# Altium PCB Control_Board_Model_C201_FFC_Sens_Conn.PcbDoc (part 11 of 12)
Units mil, origin at the board's own origin, x right, y up, seen from the top; angles counter-clockwise.
Board outline 3937.01 x 2755.91 mil, 6 copper layers (1-SIG-TOP, 2-GND, 3-PWR, 4-SIG-HOR, 5-SIG-VERT, 6-GND-BOT), stack 46.063 mil thick; 497 components, 379 nets, 1804 pads, 1610 vias.
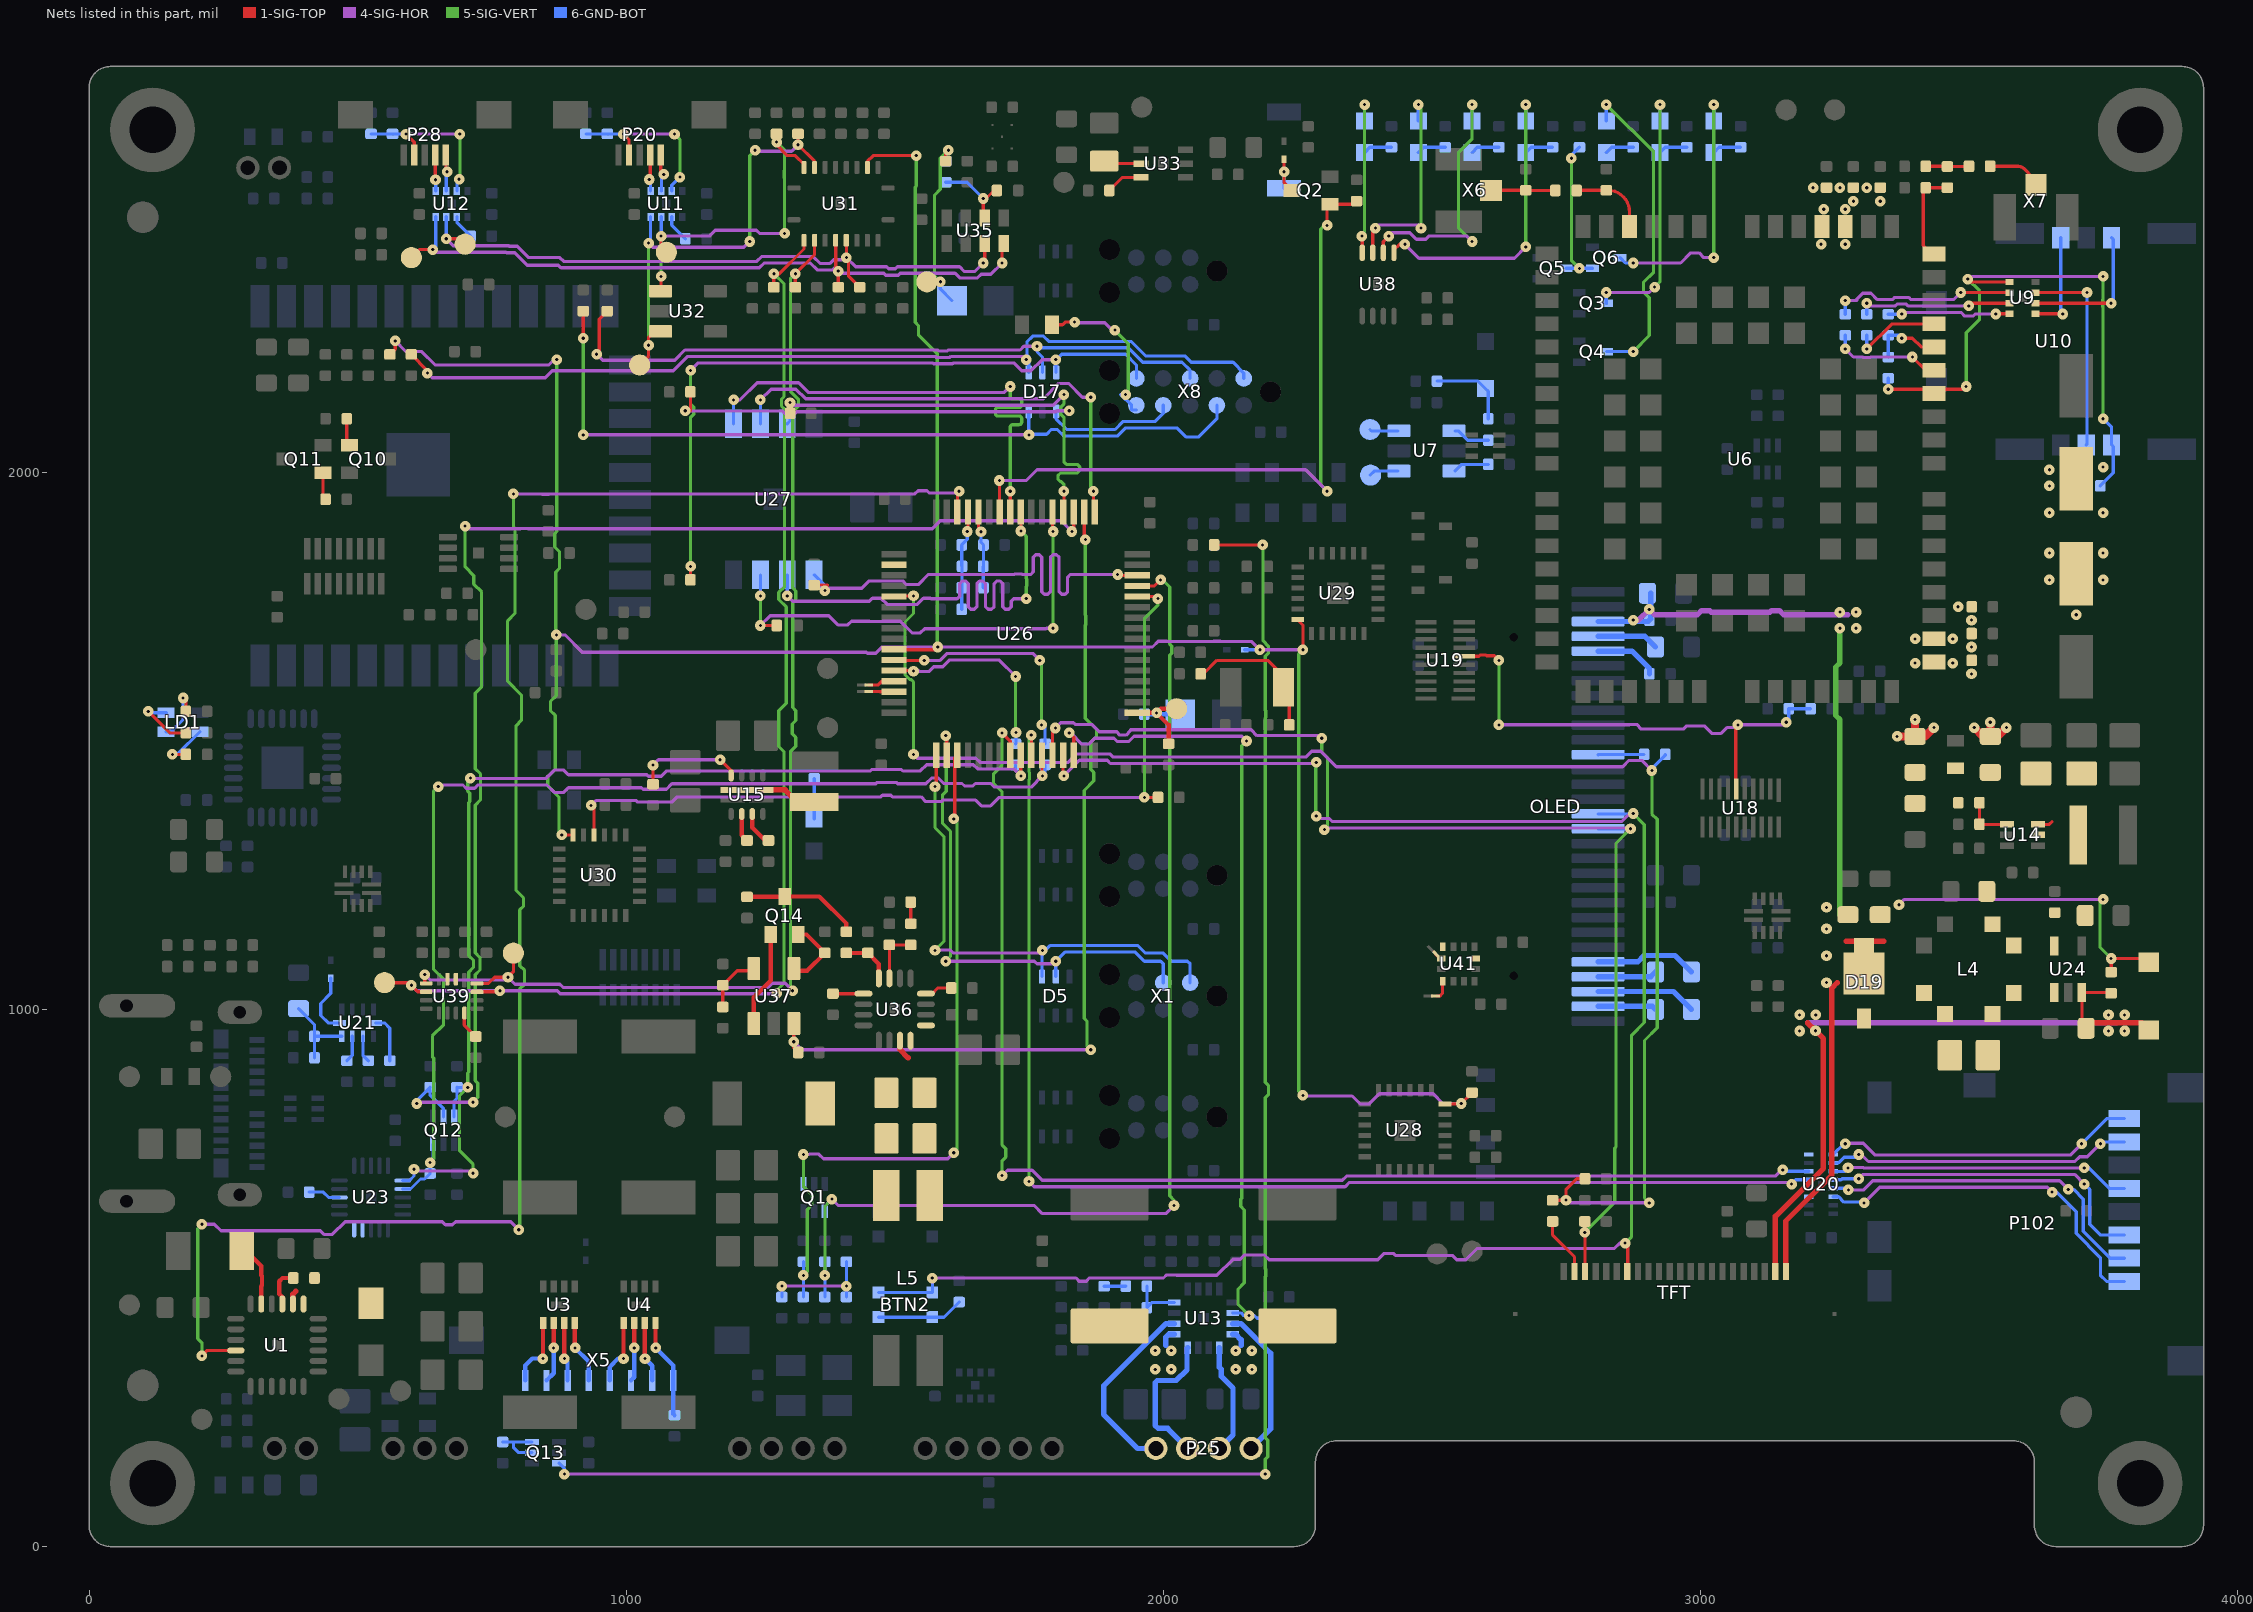
[diagram p10: the nets of this part, all layers, seen from the top]

## Via types
v1: diameter 19.68, hole 5.91, 1-SIG-TOP to 6-GND-BOT, tented both sides, 1553 vias
v2: diameter 23.81, hole 11.81, 1-SIG-TOP to 6-GND-BOT, tented both sides, 27 vias
v3: diameter 23.82, hole 11.81, 1-SIG-TOP to 6-GND-BOT, tented both sides, 26 vias
v4: diameter 21.65, hole 7.87, 1-SIG-TOP to 6-GND-BOT, tented both sides, 4 vias

## Nets (pads, with @x,y where several pads share a name; then routed paths per layer and width w, separated by ;. In a path a pad name is that pad's centre, name@x,y a point inside that pad or via, vN(x,y) a via of type N, cw(c..) or ccw(c..) an arc to the next point about the centre after c; other vN are vias at no path point) (continued)
I2C1.SCL: R146.1 TP5.1 U11.7 U31.9 U32.1 | length 680.1
  1-SIG-TOP w6: U32.1@1063.82,2337.41 1065,2337.41 v1(1065,2365) ; v1(1065,2440) 1065,2420 TP5.1@1075,2410 ; R146.1@1280,2630.32 v1(1280,2615) 1280,2610 1300,2590 1315,2590 1331.1,2573.9 U31.9@1331.1,2567.91
  4-SIG-HOR w6: v1(1065,2440) 1155,2440 1165.84,2450.84 1242.45,2450.84 1248.3,2445 v1(1295,2445)
  5-SIG-VERT w6: v1(1065,2365) v1(1065,2440) ; v1(1280,2615) 1295,2600 1295,2562.34 1294.2,2561.54 1294.2,2548.46 1295,2547.66 v1(1295,2445)
  6-GND-BOT w6: v1(1065,2440) 1065.16,2440.16 U11.7@1065.16,2475.98
I2C1.SDA: R145.1 TP6.1 U11.8 U31.8 U32.3 | length 857.1
  1-SIG-TOP w6: TP6.1@1025,2200 1041.72,2216.72 v1(1041.72,2236.72) 1041.72,2251.72 1052.6,2262.6 U32.3@1063.82,2262.6 ; R145.1@1320,2630.32 v1(1320,2610) 1350.79,2579.21 U31.8@1350.79,2567.91
  4-SIG-HOR w6: v1(1041.72,2426.96) 1049.52,2419.16 1219.16,2419.16 v1(1230,2430) ; v1(1240,2600) 1241.95,2598.05 1308.05,2598.05 v1(1320,2610)
  5-SIG-VERT w6: v1(1041.72,2236.72) v1(1041.72,2426.96) ; v1(1230,2430) 1230,2590 v1(1240,2600)
  6-GND-BOT w6: v1(1041.72,2426.96) 1045.47,2430.72 U11.8@1045.47,2475.98
I2C2.SCL: R148.1 TP7.1 U31.13 U39.5 U39.16 | length 2307.2
  1-SIG-TOP w6: v1(625,1065) 625,1051.38 U39.5@627.76,1048.62 ; U39.16@722.24,1048.62 743.62,1048.62 755,1060 v1(780,1060) 790,1070 TP7.1@790,1105 ; R148.1@1315,2344.68 v1(1315,2370) 1350.79,2405.79 U31.13@1350.79,2432.09
  4-SIG-HOR w6: v1(625,1065) 635,1055 775,1055 v1(780,1060) 793,1047 876.6,1047 882.42,1041.17 1264.55,1041.17 1272.2,1048.83 1296.17,1048.83 v1(1310,1035)
  5-SIG-VERT w6: v1(1310,1035) 1305.84,1039.16 1305.84,1480 1315.8,1489.95 1315.8,1506.54 1309.2,1513.13 1309.2,1531.54 1315.8,1538.13 1315.8,1556.54 1310,1562.34 1310,1757.66 1315.8,1763.46 1315.8,1779.2 1310,1785 1310,2112.66 1320.8,2123.46 1320.8,2136.54 1305.84,2151.5 1305.84,2360.84 v1(1315,2370)
I2C2.SDA: R147.1 TP8.1 U31.12 U39.6 U39.15 | length 2309.6
  1-SIG-TOP w6: TP8.1@550,1050 595,1050 v1(600,1045) 612.13,1032.87 U39.6@627.76,1032.87 ; U39.15@722.24,1032.87 762.87,1032.87 v1(765,1035) ; R147.1@1275,2344.68 v1(1275,2370) 1285,2370 1331.1,2416.1 U31.12@1331.1,2432.09
  4-SIG-HOR w6: v1(600,1045) 610,1035 v1(765,1035) 871.63,1035 877.45,1029.17 1279.17,1029.17 v1(1280,1030)
  5-SIG-VERT w6: v1(1275,2370) 1293.84,2351.16 1293.84,2141.18 1289.2,2136.54 1289.2,2123.46 1295,2117.66 1295,1787.34 1284.2,1776.54 1284.2,1763.46 1298,1749.66 1298,1570.34 1284.2,1556.54 1284.2,1489.64 1293.84,1480 1293.84,1048.84 1280,1035 v1(1280,1030)
I2C3.SCL: R150.1 TP9.1 U12.7 U31.16 U35.3 | length 1266.7
  1-SIG-TOP w6: v1(665,2435) 690,2435 TP9.1@700,2425 ; U31.16@1409.84,2432.09 1410,2431.93 v1(1410,2400) 1413.84,2396.16 1413.84,2365.84 R150.1@1435,2344.68 ; v1(1665,2390) 1667.72,2392.72 U35.3@1667.72,2426.38
  4-SIG-HOR w6: v1(665,2435) 678,2422 781.37,2422 782.2,2421.17 797.34,2421.17 818.51,2400 876.45,2400 883.45,2393 1243,2393 1252,2402 1348,2402 1360.84,2389.16 1379.68,2389.16 1386.37,2395.84 1405.84,2395.84 v1(1410,2400) 1427.2,2382.8 1484.87,2382.8 1488.46,2379.2 1501.54,2379.2 1505.13,2382.8 1620.77,2382.8 1629.36,2374.2 1649.2,2374.2 v1(1665,2390)
  6-GND-BOT w6: v1(665,2435) 665.16,2435.16 U12.7@665.16,2475.98
I2C3.SDA: R149.1 TP10.1 U12.8 U31.15 U35.4 | length 1342.7
  1-SIG-TOP w6: TP10.1@600,2400 615,2415 v1(640,2415) ; U31.15@1390.16,2432.09 1390.16,2379.84 v1(1395,2375) R149.1@1395,2344.68 ; v1(1700,2390) 1700,2415.35 1703.15,2418.5 U35.4@1703.15,2426.38
  4-SIG-HOR w6: v1(640,2415) 645,2410 776.4,2410 777.23,2409.17 792.37,2409.17 815.7,2385.84 873.63,2385.84 878.48,2381 1247.97,2381 1256.97,2390 1343.03,2390 1355.87,2377.16 1384.65,2377.16 1387.49,2380 1390,2380 v1(1395,2375) 1399.2,2370.8 1479.9,2370.8 1483.49,2367.2 1506.51,2367.2 1510.1,2370.8 1612.5,2370.8 1621.09,2362.2 1654.18,2362.2 1660.92,2368.95 1678.95,2368.95 v1(1700,2390)
  6-GND-BOT w6: v1(640,2415) 645.47,2420.47 U12.8@645.47,2475.98
KEY_1: U3.1 X5.1 | length 132
  1-SIG-TOP w8: v1(845,350) 845.16,350.16 845.16,415.63 U3.1@845.47,415.94
  6-GND-BOT w8: X5.1@812.2,309.45 812.2,337.2 825,350 v1(845,350)
KEY_2: U3.2 X5.2 | length 112.1
  1-SIG-TOP w8: v1(865,370) 865.16,370.16 U3.2@865.16,415.94
  6-GND-BOT w8: X5.2@851.57,309.45 865,322.87 v1(865,370)
KEY_3: U3.3 X5.3 | length 109
  1-SIG-TOP w8: U3.3@884.84,415.94 884.84,350.16 v1(885,350)
  6-GND-BOT w8: v1(885,350) 890.94,344.06 X5.3@890.94,309.45
KEY_4: U3.4 X5.4 | length 117.2
  1-SIG-TOP w8: U3.4@904.53,415.94 904.53,370.47 v1(905,370)
  6-GND-BOT w8: v1(905,370) 930.31,344.68 X5.4@930.31,309.45
KEY_5: U4.1 X5.5 | length 123
  1-SIG-TOP w8: v1(995,350) 995.16,350.16 995.16,415.63 U4.1@995.47,415.94
  6-GND-BOT w8: X5.5@969.69,309.45 969.69,334.69 985,350 v1(995,350)
KEY_6: U4.2 X5.6 | length 109
  1-SIG-TOP w8: v1(1015,370) 1015.16,370.16 U4.2@1015.16,415.94
  6-GND-BOT w8: X5.6@1009.06,309.45 1015,315.39 v1(1015,370)
KEY_7: U4.3 X5.7 | length 112.1
  1-SIG-TOP w8: U4.3@1034.84,415.94 1034.84,350.16 v1(1035,350)
  6-GND-BOT w8: v1(1035,350) 1048.43,336.57 X5.7@1048.43,309.45
KEY_8: R36.2 U4.4 X5.8 | length 186
  1-SIG-TOP w8: U4.4@1054.53,415.94 1054.53,370.47 v1(1055,370)
  6-GND-BOT w8: v1(1055,370) 1087.8,337.2 X5.8@1087.8,309.45 1087.8,246.89 R36.2@1090,244.68
LCD_BL_A: C85.1 C87.1 C93.2 C94.1 D19.1 D20.1 OLED.28 R113.1 TFT.1 | length 2361.5
  1-SIG-TOP w6: R113.1@3765,1069.68 v1(3765,1095) 3827.99,1095 D20.1@3835.01,1087.99
  1-SIG-TOP w10: TFT.1@3159.45,511.81 3159.16,512.1 3159.16,606.15 3245,692 3245,1040 3255,1050 ; 3271.9,1126.9 3341.9,1126.9
  4-SIG-HOR w6: v1(3370,1195) 3380,1205 v1(3750,1205)
  4-SIG-HOR w10: v1(2875,1725) 2885,1725 v1(2905,1745) 2915,1735 2994.83,1735 3002.63,1742.8 3017.37,1742.8 3020.17,1740 3129.83,1740 3132.63,1742.8 3147.37,1742.8 3155.17,1735 3275,1735
  5-SIG-VERT w6: v1(3750,1205) 3744.2,1199.2 3744.2,1115.8 v1(3765,1095)
  5-SIG-VERT w10: 3260,1175 3260,1539.83 3252.2,1547.63 3252.2,1637.37 3260,1645.17 v1(3260,1710)
  6-GND-BOT w10: OLED.28@2809.84,1722.44 2902.76,1722.44 C87.1@2905.32,1725 2907.44,1727.13 C85.1@2907.44,1775
  other v1: 3235,1050 3235,1100 3235,1150 3235,1190 3290,1710 3260,1740 3290,1740
LCD_BL_K: D20.2 R112.2 R113.2 TFT.2 U24.3 | length 1337.1
  1-SIG-TOP w6: R112.2@3718.46,965 3710.59,972.87 U24.3@3710.59,1031.69 3763.62,1031.69 R113.2@3764.22,1031.1
  1-SIG-TOP w10: TFT.2@3139.76,511.81 3139.76,614.76 3229,704 3229,946 v1(3214.5,960.5) 3200,975 ; R112.2@3718.46,965 3728.46,975 3822.01,975 D20.2@3835.01,962
  4-SIG-HOR w10: 3200,975 3775,975
  other v1: 3185,960 3760,960 3790,960 3185,990 3215,990 3760,990 3790,990
MICRO_SD.DAT1: U20.8
MICRO_SD.DAT2: U20.3
NetB1_1: B1.1 C101.1 R130.2 TP27.1 U26.1 | length 212.7
  1-SIG-TOP w8: U26.1@1951.38,1552.36 v1(1987.64,1552.36) ; C101.1@2010,1494.68 2010,1530 v1(1987.64,1552.36) ; TP27.1@2025,1560 1995.28,1560 v1(1987.64,1552.36)
  6-GND-BOT w8: R130.2@1964.69,1550 1985.28,1550 v1(1987.64,1552.36) 1990,1550 B1.1@2031.69,1550
NetBTN2_1: BTN2.1 R4.2 | length 161.9
  6-GND-BOT w6: BTN2.1@1469.8,427.17 BTN2.1@1570.2,427.17 1591.85,427.17 R4.2@1620,455.32
NetC2_1: C2.1 U1.21 | length 73.9
  1-SIG-TOP w8: U1.21@359.84,451.18 U1.21@359.84,451.77 359.84,464.65 354.16,470.34 354.16,494.16 360,500 C2.1@380.31,500
NetC2_2: C2.2 L1.1 U1.19 U1.20 | length 25.5
  1-SIG-TOP w10: U1.20@379.53,451.77 379.53,469.86 384.8,475.13
NetC4_2: C4.2 U1.23 | length 111.4
  1-SIG-TOP w8: C4.2@292.87,550 320.47,522.4 320.47,505.42 321.84,504.05 321.84,485.95 320.47,484.58 U1.23@320.47,451.77 U1.23@320.47,451.18
NetC11_2: C11.2 R20.1 X3.2 | length 272.1
  1-SIG-TOP w6: R20.1@2069.69,1625 2075,1625 2100,1650 2195,1650 2224.21,1620.79 X3.2@2224.21,1600 2234.69,1589.53 C11.2@2234.69,1530
NetC22_1: C22.1 R47.2 U6.43 U9.5 U10.S1 | length 1136.4
  1-SIG-TOP w6: v1(3350,2155) 3427.28,2155 U6.43@3435.24,2147.05 3443.19,2155 3490,2155 v1(3495,2160) ; v1(3497.94,2360) 3503.41,2354.53 U9.5@3575.98,2354.53
  4-SIG-HOR w6: v1(3497.94,2360) 3502.94,2365 v1(3750,2365)
  5-SIG-VERT w6: v1(3495,2160) 3495,2260 3520,2285 3520,2337.94 v1(3497.94,2360) ; v1(3750,2100) 3750,2307.66 3749.2,2308.46 3749.2,2321.54 3750,2322.34 v1(3750,2365)
  6-GND-BOT w6: v1(3350,2155) R47.2@3350,2175.32 ; C22.1@3744.68,1975 3768.84,1999.16 3768.84,2048.09 U10.S1@3765.75,2051.18 3765.75,2084.25 v1(3750,2100)
NetC25_1: C25.1 C27.1 C29.1 C31.1 FB2.1 U6.52 U6.53 | length 106.8
  1-SIG-TOP w15: v1(3366.54,1508.46) FB2.1@3400,1508.46 ; v1(3400,1540) FB2.1@3400,1508.46 ; v1(3435,1525) 3418.46,1508.46 FB2.1@3400,1508.46
  other v1: 3650,1925 3750,1925 3650,1975 3650,2005 3750,2010 3225,2425 3270,2425 3230,2490 3270,2490 3285,2505 3335,2505 3210,2530 3260,2530 3310,2530
NetC26_1: C26.1 C28.2 C30.2 C32.2 FB3.1 U6.32 U6.33 | length 100.2
  1-SIG-TOP w15: v1(3510,1525) 3526.54,1508.46 FB3.1@3540,1508.46 ; v1(3540,1535) FB3.1@3540,1508.46 ; v1(3570,1525) 3553.46,1508.46 FB3.1@3540,1508.46
  other v1: 3505,1625 3400,1645 3470,1645 3505,1675 3400,1690 3470,1690 3505,1725 3700,1735 3480,1750 3650,1800 3750,1800 3650,1850 3750,1850
NetC33_2: C33.2 R51.1 U6.60 | length 148.7
  1-SIG-TOP w6: R51.1@2769.68,2525 2770,2525.32 C33.2@2825,2525.32 2828.28,2525.32 cw(c2828.28,2485.71) 2856.29,2513.71 cw(c2827.27,2484.69) 2868.31,2484.69 U6.60@2868.31,2458.07
NetC34_2: C34.2 R52.1 U6.49 | length 173.4
  1-SIG-TOP w6: U6.49@3433.31,2407.69 cw(c3433.31,2417.34) 3426.49,2410.51 3416,2421 cw(c3418.41,2423.41) 3415,2423.41 3415,2518.69 cw(c3431,2518.69) C34.2@3419.68,2530 3459.68,2530 R52.1@3460,2530.32
NetC35_2: C35.2 R51.2 X6.2 | length 120.5
  1-SIG-TOP w6: X6.2@2610.04,2525 2610.35,2525.32 C35.2@2675,2525.32 2675.32,2525 R51.2@2730.32,2525
NetC36_2: C36.2 C37.1 R52.2 | length 80.9
  1-SIG-TOP w6: C36.2@3419.68,2570 3459.68,2570 R52.2@3460,2569.68 3500,2569.68 C37.1@3500.32,2570
NetC37_2: C37.2 X7.2 | length 103.1
  1-SIG-TOP w6: C37.2@3539.68,2570 3592.34,2570 cw(c3592.34,2556.34) 3602,2566 X7.2@3619.37,2548.63 ; X7.2@3619.38,2548.62 cw(c3605.78,2535.04) X7.2@3625,2535.04
NetC53_2: C53.2 R83.1 | length 40.4
  6-GND-BOT w6: C53.2@1890,484.68 1930,484.68 R83.1@1930.31,485
NetC59_2: C59.2 C60.2 D16.1 FB1.1 FB2.2 FB3.2 R99.2 U14.6 | length 28.3
  1-SIG-TOP w6: U14.6@3628.94,1344.68 3649.68,1344.68 3655,1350
NetC63_2: C63.2 U15.9 | length 53.5
  1-SIG-TOP w8: U15.9@1215.16,1364.07 1215.16,1324.53 C63.2@1225,1314.68
NetC73_1: C73.1 C74.1 R125.2 U21.9 | length 154.6
  6-GND-BOT w6: C73.1@390,1001.54 419.69,971.85 C74.1@419.69,950 ; R125.2@419.69,910 C74.1@419.69,950 ; U21.9@470.47,950 C74.1@419.69,950
NetC83_1: C83.1 OLED.4 | length 110.4
  6-GND-BOT w10: OLED.4@2809.84,1061.02 2907.56,1061.02 C83.1@2916.54,1070
NetC83_2: C83.2 OLED.5 | length 191.2
  6-GND-BOT w10: OLED.5@2809.84,1088.58 2883.58,1088.58 2895.5,1100.5 2952.96,1100.5 C83.2@2983.46,1070
NetC84_2: C84.2 OLED.27 | length 114.9
  6-GND-BOT w10: OLED.27@2809.84,1694.88 2896.65,1694.88 C84.2@2916.54,1675
NetC86_1: C86.1 OLED.2 | length 109.1
  6-GND-BOT w10: OLED.2@2809.84,1005.91 2910.63,1005.91 C86.1@2916.54,1000
NetC86_2: C86.2 OLED.3 | length 187.5
  6-GND-BOT w10: OLED.3@2809.84,1033.46 2950,1033.46 C86.2@2983.46,1000
NetC89_2: C89.2 U23.3 | length 60.4
  6-GND-BOT w6: C89.2@409.69,660 435.9,660 445.9,650 U23.3@465.94,650
NetC90_2: C90.2 C91.1 FB4.2 L4.4 U24.5
NetC92_1: C92.1 L4.3 U24.1
NetC92_2: C92.2 D19.2 L4.2
NetC104_2: C104.2 C105.2 R131.1 U26.28 | length 145.9
  1-SIG-TOP w6: U26.28@1656.1,1926.38 1656.1,1893.9 1656.34,1893.9 v1(1660.68,1889.55)
  6-GND-BOT w6: v1(1660.68,1889.55) 1660.68,1869.63 C104.2@1665.31,1865 1665.31,1825.63 R131.1@1664.69,1825 1664.69,1785.63 C105.2@1665.31,1785
NetC106_2: C106.2 C107.2 FB5.1 R131.2 U26.29 | length 186.8
  1-SIG-TOP w6: v1(1635,1890) 1636.42,1891.42 U26.29@1636.42,1926.38
  6-GND-BOT w6: FB5.1@1624.69,1745 C107.2@1624.69,1785 1625.31,1785.63 R131.2@1625.31,1825 1624.69,1825.63 C106.2@1624.69,1865 1635,1875.32 v1(1635,1890)
NetC122_1: C122.1 U33.3 | length 69.1
  1-SIG-TOP w6: C122.1@1899.69,2525 1924.1,2549.42 U33.3@1958.66,2549.42
NetC125_2: C125.2 R160.1 U35.6 | length 151.6
  1-SIG-TOP w6: U35.6@1667.72,2473.62 1667.72,2481.5 1665,2484.21 v1(1665,2510) 1670,2510 1685,2525 C125.2@1690.31,2525
  6-GND-BOT w6: R160.1@1595,2540.32 1634.69,2540.32 v1(1665,2510)
NetC127_1: C127.1 R160.2 R161.1 TP28.1 | length 373.9
  1-SIG-TOP w6: TP28.1@1560,2355 v1(1585,2355) ; R161.1@1595,2579.68 1595,2594.68 1600,2599.68 v1(1600,2600)
  5-SIG-VERT w6: v1(1585,2355) 1574.2,2365.8 1574.2,2516.54 1584.84,2527.18 1584.84,2584.84 v1(1600,2600)
  6-GND-BOT w6: v1(1585,2355) 1585,2341.69 C127.1@1606.69,2320 ; R160.2@1595,2579.68 1595,2595 v1(1600,2600)
NetC128_2: C128.2 U36.4 | length 51.6
  1-SIG-TOP w6: U36.4@1558.07,1029.53 1569.53,1029.53 1580,1040 C128.2@1605.31,1040
NetC129_2: C129.2 R163.1 | length 40.4
  1-SIG-TOP w6: C129.2@1529.69,1200 1530,1199.68 R163.1@1530,1159.68
NetC132_2: C132.2 R163.2 U36.7 | length 102.3
  1-SIG-TOP w6: U36.7@1490.16,1058.07 1490.16,1120.16 C132.2@1490,1120.32 R163.2@1530,1120.32
NetC133_2: C133.2 FB6.2 U37.5 | length 111.3
  1-SIG-TOP w6: FB6.2@1180,1002.72 FB6.2@1180,1004.68 C133.2@1180,1045.32 1206.93,1072.24 U37.5@1237.59,1072.24
NetC134_1: C134.1 C135.1 L5.1 U36.1 U36.15 U36.16 | length 38.2
  1-SIG-TOP w10: U36.15@1509.84,941.93 1509.84,925.16 1525,910
NetC134_2: C134.2 C135.2 D23.2 L5.2
NetD8_2: D8.2 P24.2 Q2.3 | length 95.4
  1-SIG-TOP w6: D8.2@2225,2583.46 v1(2225,2560) 2225,2539.56 Q2.3@2239.57,2524.99
  6-GND-BOT w6: P24.2@2225,2529.13 v1(2225,2560)
NetD11_1: D11.1 U38.4 | length 311.6
  1-SIG-TOP w6: v1(2370,2440) 2370.47,2439.53 U38.4@2370.47,2409.06 U38.4@2370.47,2406.1
  5-SIG-VERT w6: v1(2370,2440) 2375,2445 v1(2375,2685)
  6-GND-BOT w6: D11.1@2375,2654.53 v1(2375,2685)
NetD11_2: D11.2 R35.1 | length 54.1
  6-GND-BOT w6: D11.2@2375,2595.47 2384.84,2605.32 R35.1@2425,2605.32
NetD12_1: D12.1 R39.2 R42.2 | length 154.4
  6-GND-BOT w6: R42.2@2509.68,2170 2586.12,2170 D12.1@2600.01,2156.11 2605.32,2150.8 R39.2@2605.32,2100
NetD13_1: D13.1 Q3.3 | length 490.2
  4-SIG-HOR w6: v1(2825,2335) 2905,2335 v1(2915,2345)
  5-SIG-VERT w6: v1(2915,2345) 2925,2355 v1(2925,2685)
  6-GND-BOT w6: v1(2825,2335) 2825,2314.41 Q3.3@2825.59,2315 ; D13.1@2925,2654.53 v1(2925,2685)
NetD13_2: D13.2 R43.1 | length 54.1
  6-GND-BOT w6: D13.2@2925,2595.47 2934.84,2605.32 R43.1@2975,2605.32
NetD14_1: D14.1 Q4.3 | length 601.1
  5-SIG-VERT w6: v1(2825,2685) 2913,2597 2913,2372.48 2894.16,2353.63 2894.16,2336.37 2905,2325.52 2905,2255 v1(2875,2225)
  6-GND-BOT w6: D14.1@2825,2654.53 v1(2825,2685) ; Q4.3@2825.59,2225 v1(2875,2225)
NetD14_2: D14.2 R44.1 | length 54.1
  6-GND-BOT w6: D14.2@2825,2595.47 2834.84,2605.32 R44.1@2875,2605.32
NetD15_1: D15.1 Q6.3 | length 505.5
  4-SIG-HOR w6: v1(2875,2390) 2963.37,2390 2982.2,2408.83 2997.8,2408.83 3006.63,2400 v1(3025,2400)
  5-SIG-VERT w6: v1(3025,2400) v1(3025,2685)
  6-GND-BOT w6: Q6.3@2850.59,2400 2860.59,2390 v1(2875,2390) ; D15.1@3025,2654.53 v1(3025,2685)
NetD15_2: D15.2 R46.1 | length 54.1
  6-GND-BOT w6: D15.2@3025,2595.47 3034.84,2605.32 R46.1@3075,2605.32
NetD17_1: D17.1 R92.1 X8.4 | length 1038.5
  1-SIG-TOP w6: v1(1110,2115) 1119.37,2115 1119.69,2115.32 R92.1@1119.69,2150
  4-SIG-HOR w6: v1(1110,2115) 1110.84,2114.16 1291.37,2114.16 1296.37,2109.16 1313.63,2109.16 1317.48,2113 1799.97,2113 1801.97,2115 v1(1825,2115)
  6-GND-BOT w6: v1(1825,2115) 1801.81,2115 D17.1@1800.59,2113.78 1800.59,2099.41 1820,2080 1910.31,2080 1925.31,2095 1985,2095 2000,2110 X8.4@2000,2125
NetD17_3: D17.3 R91.1 X8.2 | length 1518
  1-SIG-TOP w6: v1(920,2250) R91.1@920,2300.32
  4-SIG-HOR w6: v1(920,2070) v1(1750,2070)
  5-SIG-VERT w6: v1(920,2070) v1(920,2250)
  6-GND-BOT w6: D17.3@1749.41,2113.78 v1@1749.41,2071.16 ; X8.2@2100,2125 2100,2100 2066.16,2066.16 2042.2,2066.16 2025.35,2083 1930.28,2083 1915.28,2068 1815.03,2068 1803.03,2080 1791.65,2080 1782.8,2071.16 v1@1749.41,2071.16 ; v1@1749.41,2070.59 v1(1750,2070) v1@1749.41,2070.59 ; v1@1749.41,2070.59 1748.84,2071.16 v1@1749.41,2071.16 ; v1@1749.41,2070.59 v1@1749.41,2071.16
NetD17_4: D17.4 R95.1 X8.10 | length 1699
  1-SIG-TOP w6: R95.1@600,2219.68 630,2189.68 v1(630,2185)
  4-SIG-HOR w6: v1(630,2185) 638.84,2176.16 849.21,2176.16 862.21,2189.16 1087.51,2189.16 1114.35,2216 1575.4,2216 1577.23,2214.17 1602.77,2214.17 1604.6,2216 1739,2216 v1(1745,2210)
  6-GND-BOT w6: v1(1745,2210) v1@1749.41,2214.41 ; D17.4@1749.41,2186.22 v1@1749.41,2214.41 ; X8.10@2150,2175 2150,2185 2130,2205 2051.97,2205 2039.97,2217 1966.94,2217 1939.94,2244 1786.97,2244 1777.13,2253.84 1757.2,2253.84 1746.16,2242.8 1746.16,2218.84 v1@1749.41,2215.59 ; v1@1749.41,2214.41 v1@1749.41,2215.59 ; v1@1749.41,2214.41 1750,2215 v1@1749.41,2215.59
NetD17_5: D17.5 R94.1 X8.8 | length 1297.1
  1-SIG-TOP w6: v1(945,2220) 950,2225 950,2285.32 R94.1@965,2300.32
  4-SIG-HOR w6: v1(945,2220) 956.08,2208.92 1090.3,2208.92 1109.38,2228 1580.37,2228 1582.2,2226.17 1597.8,2226.17 1599.63,2228 1733.52,2228 1740.52,2235 v1(1765,2235)
  6-GND-BOT w6: D17.5@1775,2186.22 1775,2215 1765,2225 v1(1765,2235) 1768,2232 1934.97,2232 1961.97,2205 2035,2205 2050,2190 X8.8@2050,2175
NetD17_6: D17.6 R93.1 X8.6 | length 1311.9
  1-SIG-TOP w6: R93.1@1119.69,1800 1119.69,1824.68 v1(1120,1825)
  4-SIG-HOR w6: v1(1120,2190) 1134,2204 1570.43,2204 1572.26,2202.17 1607.74,2202.17 1609.57,2204 1721.52,2204 1736.37,2189.16 1753.63,2189.16 1774.48,2210 v1(1800,2210)
  5-SIG-VERT w6: v1(1120,1825) 1120,2102.66 1125.8,2108.46 1125.8,2121.54 1120,2127.34 v1(1120,2190)
  6-GND-BOT w6: v1(1800,2210) 1800,2206.22 v1@1800.59,2205.63 ; D17.6@1800.59,2186.22 v1@1800.59,2205.63 ; X8.6@1950,2175 1950,2200 1930,2220 1811.18,2220 1800.59,2209.41 v1@1800.59,2205.63
NetD18_2: D18.2 R101.1 | length 75.8
  6-GND-BOT w6: D18.2@1350,1354.53 R101.1@1350,1430.32
NetD22_1: D22.1 U21.10 | length 118.1
  6-GND-BOT w6: D22.1@450,1058.46 450,1030 431.16,1011.16 431.16,988.84 445,975 U21.10@466.14,975
NetJ1_2: J1.2 X8.5 | length 313.4
  1-SIG-TOP w6: J1.2@1792.56,2275 1812.56,2275 1817.56,2280 v1(1835,2280)
  4-SIG-HOR w6: v1(1835,2280) 1836.34,2278.66 1891.34,2278.66 1905,2265 v1(1910,2265)
  5-SIG-VERT w6: v1(1910,2265) 1935,2240 1935,2150 v1(1930,2145)
  6-GND-BOT w6: v1(1930,2145) 1921,2145 1941,2125 1941,2116 X8.5@1950,2116
NetL2_2: L2.2 U14.5
NetL3_1: L3.1 U15.2 | length 134.2
  1-SIG-TOP w10: U15.2@1225,1408.86 1296.14,1408.86 1318.39,1386.61 L3.1@1350,1386.61
NetLD1_BK: LD1.BK R106.2 | length 94.3
  1-SIG-TOP w6: v1(155,1475) R106.2@180.31,1475
  6-GND-BOT w6: v1(155,1475) 164.21,1475 LD1.BK@206.5,1517.28
NetLD1_GK: LD1.GK R105.2 | length 108.1
  1-SIG-TOP w6: v1(175,1580) 180.31,1574.68 R105.2@180.31,1555
  6-GND-BOT w6: LD1.GK@143.5,1517.28 152.28,1517.28 175,1540 v1(175,1580)
NetLD1_RK: LD1.RK R104.2 | length 121.3
  1-SIG-TOP w6: v1(110,1555) 150,1515 R104.2@180.31,1515
  6-GND-BOT w6: v1(110,1555) 112.28,1552.72 LD1.RK@143.5,1552.72
NetNT3_1: NT3.1 U41.11 | length 13.6
  1-SIG-TOP w6: NT3.1@2507.75,1103.07 2515.98,1094.84 U41.11@2517.91,1094.84
NetNT4_1: NT4.1 U41.1 | length 35.5
  1-SIG-TOP w6: NT4.1@2510,1025 2515,1025 2520,1030 2520,1052.91 U41.1@2520.47,1052.91
NetOLED_19: OLED.19 R111.2 | length 85.7
  6-GND-BOT w6: OLED.19@2809.84,1474.41 2810.43,1475 R111.2@2895.32,1475
NetOLED_26: OLED.26 R110.1 | length 118.7
  6-GND-BOT w10: OLED.26@2809.84,1667.32 2872.68,1667.32 2905.32,1634.68 R110.1@2905.32,1625
NetP09_1: P09.1 U38.1 | length 573.2
  1-SIG-TOP w6: U38.1@2429.53,2406.1 U38.1@2429.53,2409.06 2429.53,2414.53 2440,2425 v1(2450,2425)
  4-SIG-HOR w6: v1(2450,2425) 2476,2399 2654,2399 v1(2675,2420)
  5-SIG-VERT w6: v1(2675,2420) v1(2675,2685)
  6-GND-BOT w6: P09.1@2675,2654.53 v1(2675,2685)
NetP09_2: P09.2 R32.1 | length 54.1
  6-GND-BOT w6: P09.2@2675,2595.47 2684.84,2605.32 R32.1@2725,2605.32
NetP15_1: P15.1 U38.2 | length 513.5
  1-SIG-TOP w6: U38.2@2409.84,2406.1 U38.2@2409.84,2409.06 2409.84,2429.84 v1(2420,2440)
  4-SIG-HOR w6: v1(2420,2440) 2426.37,2446.37 2459.16,2446.37 2471.37,2434.16 2488.63,2434.16 2494.48,2440 2565,2440 v1(2575,2430)
  5-SIG-VERT w6: v1(2575,2430) 2550,2455 2550,2596.25 2575,2621.25 v1(2575,2685)
  6-GND-BOT w6: P15.1@2575,2654.53 v1(2575,2685)
NetP15_2: P15.2 R33.1 | length 54.1
  6-GND-BOT w6: P15.2@2575,2595.47 2584.84,2605.32 R33.1@2625,2605.32
NetP23_1: P23.1 U38.3 | length 403.3
  1-SIG-TOP w6: U38.3@2390.16,2406.1 U38.3@2390.16,2409.06 2390.16,2450.16 v1(2395,2455)
  4-SIG-HOR w6: v1(2395,2455) 2400.84,2460.84 2474.16,2460.84 v1(2480,2455)
  5-SIG-VERT w6: v1(2475,2685) 2480,2680 v1(2480,2455)
  6-GND-BOT w6: P23.1@2475,2654.53 v1(2475,2685)
NetP23_2: P23.2 R34.1 | length 54.1
  6-GND-BOT w6: P23.2@2475,2595.47 2484.84,2605.32 R34.1@2525,2605.32
NetP102_1: P102.1 U20.14 | length 674
  4-SIG-HOR w6: v1(3305,640) 3334,669 3646,669 v1(3655,660)
  6-GND-BOT w6: U20.14@3247.64,651.38 3257.41,651.38 3267.41,641.38 3303.62,641.38 v1(3305,640) ; v1(3655,660) 3663.35,660 3700,623.35 3700,583.03 3745,538.03 3745,505 3756.3,493.7 P102.1@3789.37,493.7
NetP102_2: P102.2 U20.13 | length 644.7
  4-SIG-HOR w6: v1(3275.84,664.16) 3304.16,664.16 3321,681 3669,681 v1(3685,665)
  6-GND-BOT w6: U20.13@3247.64,667.13 3272.87,667.13 v1(3275.84,664.16) ; v1(3685,665) 3695,665 3713,647 3713,587 3762.99,537.01 P102.2@3789.37,537.01
NetP102_3: P102.3 U20.12 | length 630.7
  4-SIG-HOR w6: v1(3295,685) 3303,693 3697,693 v1(3715,675)
  6-GND-BOT w6: U20.12@3247.64,682.87 3262.13,682.87 3264.25,685 v1(3295,685) ; v1(3715,675) 3725,665 3725,600 3744.69,580.31 P102.3@3789.37,580.31
NetP102_5: P102.5 U20.11 | length 560.8
  4-SIG-HOR w6: v1(3275,705) 3275.84,705.84 3303.63,705.84 3304.48,705 v1(3715,705)
  6-GND-BOT w6: U20.11@3247.64,698.62 3268.62,698.62 v1(3275,705) ; v1(3715,705) 3723.35,705 3761.42,666.93 P102.5@3789.37,666.93
NetP102_7: P102.7 U20.10 | length 568.7
  4-SIG-HOR w6: v1(3295,730) 3300,730 3313,717 3697.52,717 3706.37,725.84 3720.84,725.84 v1(3745,750)
  6-GND-BOT w6: U20.10@3247.64,714.37 3257.41,714.37 3268.04,725 3290,725 v1(3295,730) ; v1(3745,750) 3748.54,753.54 P102.7@3789.37,753.54
NetP102_8: P102.8 U20.9 | length 592.2
  4-SIG-HOR w6: v1(3270,750) 3270,746.68 3274.16,750.84 3303.63,750.84 3325.48,729 3689,729 v1(3710,750)
  6-GND-BOT w6: U20.9@3247.64,730.12 3267.52,750 v1(3270,750) ; v1(3710,750) 3756.85,796.85 P102.8@3789.37,796.85
NetQ5_3: Q5.3 Q6.1 R45.2 | length 286.8
  5-SIG-VERT w6: v1(2760,2585) 2760,2395 v1(2775,2380)
  6-GND-BOT w6: Q5.3@2750.59,2380 v1(2775,2380) 2798.91,2380 Q6.1@2799.41,2380.5 ; v1(2760,2585) 2760,2590.32 R45.2@2775,2605.32
NetQ10_1: Q10.1 R62.2 | length 51.4
  1-SIG-TOP w6: R62.2@479.69,2100 479.69,2055.48 Q10.1@484.57,2050.6
NetQ11_1: Q11.1 R63.2 | length 51.4
  1-SIG-TOP w6: Q11.1@435.43,1999.4 435.43,1954.88 R63.2@440.31,1950
NetQ13_3: Q13.3 R139.1 | length 3166.5
  1-SIG-TOP w6: R139.1@2094.69,1865 v1(2185,1865)
  4-SIG-HOR w6: v1(885,135) v1(2190,135)
  5-SIG-VERT w6: v1(2185,1865) 2185.84,1864.16 2185.84,1686.5 2195.8,1676.54 2195.8,1663.46 2190,1657.66 2190,1557.34 2190.8,1556.54 2190.8,1543.46 2190,1542.66 2190,864.48 2195.84,858.63 2195.84,841.37 2190,835.52 2190,517.34 2190.8,516.54 2190.8,503.46 2190,502.66 2190,202.41 2194.56,197.86 2194.56,167.22 2190,162.67 v1(2190,135)
  6-GND-BOT w6: Q13.3@875.2,155.32 885,145.51 v1(885,135)
NetQ13_5: Q13.5 Q13.6 R135.1 | length 103.4
  6-GND-BOT w6: R135.1@770,194.68 790,194.68 ; Q13.5@824.8,175 800,175 790,185 790,194.68 ; Q13.6@824.8,194.68 790,194.68
NetQ14_1: Q14.1 U37.1 | length 175
  1-SIG-TOP w8: U37.1@1237.59,977.76 1237.59,1022.59 1269.4,1054.4 Q14.1@1269.4,1139.57
NetQ14_2: Q14.2 R166.2 U37.4 | length 134.9
  1-SIG-TOP w8: U37.4@1312.4,1072.24 1336.93,1072.24 R166.2@1370,1105.32 1335.75,1139.57 Q14.2@1320.58,1139.57
NetQ14_3: Q14.3 R167.1 R168.1 | length 221.5
  1-SIG-TOP w8: R168.1@1225,1209.68 1294.25,1209.68 Q14.3@1294.99,1210.43 1359.57,1210.43 1410,1160 R167.1@1410,1144.68
NetR25_1: R25.1 R26.1 R27.2 | length 205.9
  4-SIG-HOR w6: v1(1290,485) v1(1410,485)
  6-GND-BOT w6: R25.1@1290,464.68 v1(1290,485) ; R26.1@1410,464.68 v1(1410,485) R27.2@1410,530.32
NetR40_2: R40.2 U7.1 | length 69.4
  6-GND-BOT w6: U7.1@2543.15,2077.41 2549.59,2077.41 2567,2060 R40.2@2605.32,2060
NetR41_2: R41.2 U7.3 | length 67.3
  6-GND-BOT w6: U7.3@2543.15,2002.6 2555.54,2015 R41.2@2605.32,2015
NetR47_1: R47.1 R48.1 U6.45 | length 134.5
  1-SIG-TOP w6: v1(3375,2250) 3395,2250 3411.34,2233.66 U6.45@3435.24,2233.66
  6-GND-BOT w6: R47.1@3350,2215 R48.1@3350,2255.32 3369.68,2255.32 v1(3375,2250)
NetR48_2: R48.2 U9.8 | length 232
  1-SIG-TOP w6: v1(3550,2295) 3550.47,2295.47 U9.8@3575.98,2295.47
  4-SIG-HOR w6: v1(3375,2295) 3378,2298 3485.37,2298 3492.2,2291.17 3507.8,2291.17 3511.63,2295 v1(3550,2295)
  6-GND-BOT w6: R48.2@3350,2294.68 3374.68,2294.68 v1(3375,2295)
NetR49_1: R49.1 U6.46 | length 170
  1-SIG-TOP w6: v1(3310,2230) 3356.16,2276.16 3434.43,2276.16 U6.46@3435.24,2276.97
  6-GND-BOT w6: v1(3310,2230) R49.1@3310,2255.32
NetR49_2: R49.2 U9.7 | length 293.7
  1-SIG-TOP w6: v1(3500,2310) 3505.16,2315.16 U9.7@3575.98,2315.16
  4-SIG-HOR w6: v1(3310,2315) 3315,2310 3363.37,2310 3367.2,2313.83 3382.8,2313.83 3386.63,2310 v1(3500,2310)
  6-GND-BOT w6: R49.2@3310,2294.68 v1(3310,2315)
NetR50_1: R50.1 U6.44 | length 207.6
  1-SIG-TOP w6: v1(3395,2215) 3419.65,2190.35 U6.44@3435.24,2190.35
  4-SIG-HOR w6: v1(3270,2230) 3285,2215 3302.66,2215 3303.46,2214.2 3316.54,2214.2 3317.34,2215 v1(3395,2215)
  6-GND-BOT w6: v1(3270,2230) R50.1@3270,2255.32
NetR50_2: R50.2 U9.6 | length 352.7
  1-SIG-TOP w6: v1(3485,2335) 3485.16,2334.84 U9.6@3575.98,2334.84
  4-SIG-HOR w6: v1(3270,2320) 3291.17,2320 3291.17,2322.8 3302.2,2333.83 3317.8,2333.83 3328.83,2322.8 3328.83,2322 3358.4,2322 3362.23,2325.83 3387.77,2325.83 3391.6,2322 3472,2322 v1(3485,2335)
  6-GND-BOT w6: R50.2@3270,2294.68 v1(3270,2320)
NetR53_2: R53.2 R54.2 U18.6 U19.6 | length 934.4
  1-SIG-TOP w6: U19.6@2560.43,1657.87 2587.87,1657.87 2590,1660 2601.04,1660 2602.2,1658.84 2616.16,1658.84 v1(2625,1650) ; U18.6@3067.13,1410.43 3066.16,1411.4 3066.16,1526.16 v1(3070,1530)
  4-SIG-HOR w6: v1(2625,1530) 2867.66,1530 2868.46,1530.8 2881.54,1530.8 2890.18,1522.16 2968.6,1522.16 2974.45,1528 3007.52,1528 3021.37,1514.16 3038.63,1514.16 3049.48,1525 3065,1525 v1(3070,1530) 3155,1530 v1(3160,1535)
  5-SIG-VERT w6: v1(2625,1530) v1(2625,1650)
  6-GND-BOT w6: v1(3160,1535) 3164.68,1539.68 R54.2@3164.68,1560 R53.2@3205.32,1560
NetR74_2: R74.2 U11.6 | length 51.5
  6-GND-BOT w6: U11.6@1084.84,2475.98 1084.84,2460.47 R74.2@1110.31,2435
NetR75_2: R75.2 U12.6 | length 46.5
  6-GND-BOT w6: U12.6@684.84,2475.98 684.84,2465.47 R75.2@710.31,2440
NetR83_2: R83.2 R84.2 U13.12 | length 94.7
  6-GND-BOT w6: R83.2@1969.69,485 R84.2@1969.69,445 1979.21,454.53 U13.12@2020.47,454.53
NetR89_2: R89.2 U13.9 | length 32.7
  6-GND-BOT w10: 2005,375 2005,390 2010.47,395.47 U13.9@2020.47,395.47
  other v1: 1985,330 2015,330 1985,365 2015,365
NetR90_2: R90.2 U13.4 | length 29.8
  6-GND-BOT w10: U13.4@2129.53,395.47 2134.53,395.47 2145,385 2145,375
  other v1: 2135,330 2165,330 2135,365 2165,365
NetR96_1: R96.1 U15.6 | length 202
  1-SIG-TOP w6: R96.1@1050,1419.68 v1(1050,1455) ; v1(1175,1465) 1195.47,1444.53 U15.6@1195.47,1435.93
  4-SIG-HOR w6: v1(1050,1455) 1060,1465 v1(1175,1465)
NetR98_2: R98.2 R99.1 U14.1 | length 91.5
  1-SIG-TOP w6: R99.1@3519.68,1385 R98.2@3519.68,1345 3520,1344.68 U14.1@3571.06,1344.68
NetR100_2: R100.2 U15.10 | length 65.5
  1-SIG-TOP w8: U15.10@1234.84,1364.07 1234.84,1338.65 1258.8,1314.68 R100.2@1265,1314.68
NetR109_2: R109.2 TFT.21 | length 110.4
  1-SIG-TOP w6: R109.2@2725,605.32 2725,580 2765.75,539.25 TFT.21@2765.75,511.81
NetR121_2: R121.2 U39.12 | length 52.7
  1-SIG-TOP w6: U39.12@698.62,993.5 698.62,971.06 R121.2@720,949.68
NetR126_2: R126.2 U21.7 | length 49.5
  6-GND-BOT w6: U21.7@509.84,950 509.84,914.84 R126.2@520,904.68
NetR127_2: R127.2 U21.8 | length 49.5
  6-GND-BOT w6: R127.2@480,904.68 490.16,914.84 U21.8@490.16,950
NetR129_1: R129.1 U21.5 | length 90.6
  6-GND-BOT w6: U21.5@533.86,975 550,975 560,965 R129.1@560,904.68
NetR158_1: R158.1 U33.2 | length 70.6
  1-SIG-TOP w6: R158.1@1890,2579.57 1894.56,2575.01 U33.2@1958.66,2575.01
NetR162_2: R162.2 U36.9 | length 57
  1-SIG-TOP w6: R162.2@1385,1029.68 1385.16,1029.53 U36.9@1441.93,1029.53
NetR165_1: R165.1 R167.2 U36.8 | length 95.7
  1-SIG-TOP w8: R167.2@1410,1105.32 R165.1@1450,1105.32 1470.47,1084.84 U36.8@1470.47,1058.07
NetTP25_1: TP25.1 U7.6 | length 52.9
  6-GND-BOT w6: TP25.1@2385,2080 2387.59,2077.41 U7.6@2436.85,2077.41
NetTP26_1: TP26.1 U7.4 | length 55
  6-GND-BOT w6: TP26.1@2385,1995 2392.6,2002.6 U7.4@2436.85,2002.6
NetU9_1: U9.1 U10.S6 | length 194.7
  1-SIG-TOP w6: U9.1@3624.02,2295.47 3674.53,2295.47 v1(3675,2295)
  6-GND-BOT w6: U10.S6@3671.26,2437.01 3671.26,2298.74 v1(3675,2295)
NetU9_2: U9.2 U10.S3 | length 265.9
  1-SIG-TOP w6: U9.2@3624.02,2315.16 3764.84,2315.16 v1(3765,2315)
  6-GND-BOT w6: v1(3765,2315) 3768.84,2318.84 3768.84,2433.91 U10.S3@3765.75,2437.01
NetU9_3: U9.3 U10.S2 | length 380.5
  1-SIG-TOP w6: U9.3@3624.02,2334.84 3719.84,2334.84 v1(3720,2335)
  6-GND-BOT w6: U10.S2@3718.5,2051.18 3720,2052.68 v1(3720,2335)
NetU23_19: U23.19
NetU23_20: U23.20
NetU39_2: U39.2
NetU39_3: U39.3
NetU41_6: U41.6
NetU41_10: U41.10
OUTA1: P25.4 U13.3 | length 285.7
  6-GND-BOT w10: U13.3@2129.53,415.16 2144.84,415.16 2200,360 2200,219.09 P25.4@2163.58,182.68
OUTA2: P25.3 U13.5 | length 208.9
  6-GND-BOT w10: P25.3@2104.53,182.68 2130,208.15 2130,295 2107.69,317.32 2107.69,330.48 2104.53,333.63 U13.5@2104.53,370.47
OUTB1: P25.1 U13.10 | length 356.1
  6-GND-BOT w10: P25.1@1986.42,182.68 1952.32,182.68 1889.16,245.84 1889.16,299.16 2005.16,415.16 U13.10@2020.47,415.16
OUTB2: P25.2 U13.8 | length 268.6
  6-GND-BOT w10: P25.2@2045.47,182.68 2008.15,220 1990.68,220 1985,225.68 1985,305 1989.16,309.16 2024.16,309.16 2044.16,329.16 2044.16,369.16 U13.8@2045.47,370.47
P20_GPIO: C48.2 P20.4 R76.1 U11.3 | length 325.4
  1-SIG-TOP w6: v1(995,2630) 1005.31,2619.68 P20.4@1005.31,2590.94
  4-SIG-HOR w6: v1(995,2630) v1(1090,2630)
  5-SIG-VERT w6: v1(1090,2630) 1100,2620 v1(1100,2550)
  6-GND-BOT w6: C48.2@925,2630.32 R76.1@965,2630.32 965.94,2629.37 966.57,2630 v1(995,2630) ; U11.3@1084.84,2524.02 1084.84,2534.84 v1(1100,2550)
P20_SCL: P20.1 U11.2 | length 74.9
  1-SIG-TOP w6: P20.1@1064.37,2590.94 1064.37,2555.63 1065,2555 v1(1070,2555)
  6-GND-BOT w6: U11.2@1065.16,2524.02 1066.01,2524.87 1066.01,2549.03 1065.16,2549.88 1065.16,2550.16 v1(1070,2555)
P20_SDA: P20.2 U11.1 | length 72.1
  1-SIG-TOP w6: v1(1042.99,2545.4) 1045.36,2545.4 1047.17,2547.2 1044.69,2549.68 P20.2@1044.69,2590.94
  6-GND-BOT w6: v1(1042.99,2545.4) 1042.99,2542.01 1045.47,2539.53 U11.1@1045.47,2524.02
P28_GPIO: C49.2 P28.4 R77.1 U12.3 | length 319.9
  1-SIG-TOP w6: v1(590,2630) 605.31,2614.68 P28.4@605.31,2590.94
  4-SIG-HOR w6: v1(590,2630) v1(690,2630)
  5-SIG-VERT w6: v1(689.02,2545.82) 690.84,2547.64 690.84,2629.16 v1(690,2630)
  6-GND-BOT w6: C49.2@525,2630.32 R77.1@565,2630.32 565.94,2629.37 566.57,2630 v1(590,2630) ; U12.3@684.84,2524.02 684.84,2541.64 v1(689.02,2545.82)
P28_SCL: P28.1 U12.2 | length 68.4
  1-SIG-TOP w6: P28.1@664.37,2590.94 664.37,2561.95 v1(666.6,2559.72)
  6-GND-BOT w6: U12.2@665.16,2524.02 665.16,2558.28 v1(666.6,2559.72)
P28_SDA: P28.2 U12.1 | length 68.2
  1-SIG-TOP w6: P28.2@644.69,2590.94 644.69,2545.32 v1(645,2545)
  6-GND-BOT w6: v1(645,2545) 645.94,2545 645.47,2544.53 U12.1@645.47,2524.02
PA0: R17.2 U26.12 U30.22 | length 1560.9
  1-SIG-TOP w6: v1(934.63,1380) 940.16,1374.47 U30.22@940.16,1324.8 ; U26.12@1951.38,1768.9 1986.1,1768.9 v1(1990,1765) ; v1(1965,1395) R17.2@1990.31,1395
  4-SIG-HOR w6: v1(934.63,1380) 943.63,1389 1018.64,1389 1021.48,1386.16 1085.1,1386.16 1094.74,1395.8 1474.17,1395.8 1477.2,1398.83 1492.8,1398.83 1495.83,1395.8 1549.2,1395.8 1557.8,1387.2 1586.51,1387.2 1589.31,1390 1650.52,1390 1661.37,1379.16 1678.63,1379.16 1694.48,1395 v1(1965,1395)
  5-SIG-VERT w6: v1(1965,1395) 1965,1727.82 1990,1752.82 v1(1990,1765)
PA1: Q1.4 R23.1 R24.2 U26.13 | length 2132.2
  1-SIG-TOP w6: U26.13@1951.38,1788.58 1983.58,1788.58 v1(1995,1800)
  4-SIG-HOR w6: v1(1383,647) 1395,635 1760,635 1775,620 2005,620 v1(2020,635)
  5-SIG-VERT w6: v1(1370,505) 1370,634 v1(1383,647) ; v1@1992.87,1794.29 v1@1995,1796.42 ; v1(1995,1800) v1@1995,1796.42 ; v1(2020,635) 2020,645 2011.95,653.05 2011.95,1659.61 2015.8,1663.46 2015.8,1676.54 2011.95,1680.39 2011.95,1786.63 1998.58,1800 v1@1995,1796.42
  6-GND-BOT w6: Q1.4@1369.69,624.8 1369.69,633.68 v1(1383,647) ; R23.1@1370,464.68 v1(1370,505) R24.2@1370,530.32
PA2: R141.2 U26.14 U27.1 | length 945.8
  1-SIG-TOP w6: R141.2@1350,1790.32 1370,1790.32 1374.69,1790.32 1375,1790 1370,1785 v1(1370,1780) ; v1(1915,1810) 1916.73,1808.27 U26.14@1951.38,1808.27
  4-SIG-HOR w6: v1(1370,1780) 1374.16,1784.16 1438.63,1784.16 1452.48,1798 1515.17,1798 1522,1791.17 1543.84,1791.17 1562.67,1810 1706.17,1810 1722.66,1810 1723.46,1810.8 1736.54,1810.8 1737.34,1810 1750,1810 1753.2,1810 1758,1814.8 1758,1842.05 1762.8,1846.85 1769.2,1846.85 1774,1842.05 1774,1810 1774,1777.95 1778.8,1773.15 1785.2,1773.15 1790,1777.95 1790,1810 1790,1842.05 1794.8,1846.85 1801.2,1846.85 1806,1842.05 1806,1810 1806,1777.95 1810.8,1773.15 1817.2,1773.15 1822,1777.95 1822,1805.2 1826.8,1810 1830,1810 v1(1915,1810)
  6-GND-BOT w6: U27.1@1350,1809.25 1374.25,1785 1370,1780.75 v1(1370,1780)
PA3: U26.17 U27.6 | length 914.4
  1-SIG-TOP w6: v1(1870,1965) 1870,1929.02 U26.17@1872.64,1926.38
  4-SIG-HOR w6: v1(1250,2135) 1270,2155 1316.06,2155 1334.06,2137 1777,2137 1805.84,2165.84 1823.63,2165.84 1849.48,2140 v1(1865,2140)
  5-SIG-VERT w6: v1(1865,2140) 1865,1970 v1(1870,1965)
  6-GND-BOT w6: U27.6@1250,2090.75 v1(1250,2135)
PA4: R164.1 U26.18 U37.3 | length 1653.4
  1-SIG-TOP w6: U37.3@1312.4,977.76 1314.69,975.47 1312,972.78 v1(1312,940) 1312,928.32 R164.1@1320.31,920 ; U26.18@1852.95,1926.38 1852.95,1877.05 v1(1855,1875)
  4-SIG-HOR w6: v1(1312,940) 1327,925 v1(1865,925)
  5-SIG-VERT w6: v1(1855,1875) 1855,1734.48 1855.84,1733.63 1855.84,1716.37 1855,1715.52 1855,1542.34 1875.8,1521.54 1875.8,1508.46 1865,1497.66 1865,1447.34 1870.8,1441.54 1870.8,1425.8 1852.8,1407.8 1852.8,983.65 1857.84,978.6 1857.84,932.16 v1(1865,925)
PA5: Q12.2 R114.2 U26.19 | length 2503.1
  1-SIG-TOP w6: v1(1830,1890) 1833.27,1893.27 U26.19@1833.27,1926.38
  4-SIG-HOR w6: v1(610,825) 612.35,827.35 v1(715,827.35) ; v1(700,1900) 705,1895 802.66,1895 803.46,1895.8 816.54,1895.8 817.34,1895 1570,1895 1585,1910 1810,1910 v1(1830,1890)
  5-SIG-VERT w6: v1(700,1900) 700,1824 716.19,1807.81 ; v1(715,827.35) 723.83,836.17 723.83,862.8 719,867.63 719,1064.69 727.8,1073.49 727.8,1096.51 719,1105.31 719,1380.4 728.83,1390.23 728.83,1438.61 719,1448.44 719,1589 730.8,1600.8 730.8,1777.58 716.17,1792.2 716.17,1807.8
  6-GND-BOT w6: v1(610,825) 610,830.32 R114.2@635,855.32 ; R114.2@635,850 635,840 660,815 Q12.2@660,800.2
PA6: R143.2 U26.20 U27.7 | length 879.6
  1-SIG-TOP w6: v1(1305,2130) 1305,2134.37 1305.31,2134.68 1305.31,2130 R143.2@1305.31,2110 ; U26.20@1813.58,1926.38 1815,1927.8 v1(1815,1965)
  4-SIG-HOR w6: v1(1305,2130) 1310,2125 1795,2125 v1(1815,2145)
  5-SIG-VERT w6: v1(1815,1965) 1815,1975 1815,1978.2 1810.2,1983 1808.78,1983 1803.98,1987.8 1803.98,1994.2 1808.78,1999 1815,1999 1839.85,1999 1844.65,2003.8 1844.65,2010.2 1839.85,2015 1819.8,2015 1815,2019.8 1815,2020 1815,2102.66 1809.2,2108.46 1809.2,2121.54 1815,2127.34 v1(1815,2145)
  6-GND-BOT w6: U27.7@1300,2090.75 1305,2095.75 v1(1305,2130)
PA7: R142.2 U26.21 U27.3 | length 917
  1-SIG-TOP w6: v1(1250,1715) R142.2@1280.31,1715 ; U26.21@1793.9,1926.38 1793.9,1891.1 v1(1795,1890)
  4-SIG-HOR w6: v1(1250,1715) 1268,1733 1377.52,1733 1394.35,1716.17 1412.8,1716.17 1419.63,1723 1452.69,1723 1453.49,1722.2 1476.51,1722.2 1477.31,1723 1510.37,1723 1532.2,1701.17 1547.8,1701.17 1555.67,1709.05 1781.54,1709.05 1782.49,1710 v1(1795,1710)
  5-SIG-VERT w6: v1(1250,1715) v1(1250,1770) ; v1(1795,1710) v1(1795,1890)
  6-GND-BOT w6: v1(1250,1770) U27.3@1250,1809.25
PA8: D4.2 R15.2 R61.1 U26.42 U28.24 U29.24 U30.24 U31.3 | length 5137.8
  1-SIG-TOP w6: R61.1@560,2219.68 570,2229.68 v1(570,2245) ; v1(880,1325) 880.2,1324.8 U30.24@900.79,1324.8 ; U31.3@1449.21,2567.91 1449.21,2579.21 1460,2590 v1(1540,2590) ; U26.42@1498.62,1670.47 1499.09,1670 1575,1670 v1(1580,1675) ; U29.24@2250.2,1725.79 2260,1715.98 v1(2260,1670) ; U28.24@2524.8,824.21 2554.21,824.21 v1(2555,825) 2575,845 R15.2@2575,845.32
  4-SIG-HOR w6: v1(570,2245) 590,2225 619.48,2225 644.48,2200 856.08,2200 866.08,2210 v1(870.84,2210) ; v1(870,1697.5) 886.05,1697.5 918.35,1665.2 1447.33,1665.2 1449.28,1663.25 1464.88,1663.25 1475.91,1674.28 1475.91,1675 v1(1580,1675) 1980,1675 1990.8,1685.8 2006.54,1685.8 2007.34,1685 2092.66,1685 2093.46,1685.8 2106.54,1685.8 2107.34,1685 2165,1685 v1(2180,1670) v1(2260,1670) ; v1(2260,840) 2260,840.22 2261.27,838.95 2351.57,838.95 2366.37,824.16 2383.63,824.16 2402.48,843 2502.52,843 2520.52,825 v1(2555,825)
  5-SIG-VERT w6: v1(870.84,2210) 870.84,1890.15 866.89,1886.2 866.89,1861.14 875.84,1852.19 875.84,1821.37 868.73,1814.26 868.73,1698.77 v1(870,1697.5) 870,1584.48 859.16,1573.63 859.16,1556.37 868,1547.52 868,1447.48 854.16,1433.63 854.16,1416.37 875,1395.52 875,1330 v1(880,1325) ; v1(1540,2590) 1540,2533.25 1538.2,2531.45 1538.2,2279.59 1544.16,2273.63 1544.16,2256.37 1579.2,2221.32 1579.2,1675.8 v1(1580,1675) ; v1(2260,840) 2252.16,847.84 2252.16,1662.16 v1(2260,1670)
  6-GND-BOT w6: D4.2@2151.54,1670 v1(2180,1670)
PA9: R18.2 U26.43 | length 441.9
  1-SIG-TOP w6: U26.43@1498.62,1650.79 1499.41,1650 v1(1555,1650)
  4-SIG-HOR w6: v1(1555,1650) 1584.48,1650 1597.48,1663 1757,1663 v1(1770,1650)
  5-SIG-VERT w6: v1(1770,1650) 1773.49,1646.51 v1(1773.49,1530)
  6-GND-BOT w6: v1(1773.49,1530) 1780,1523.49 R18.2@1780,1494.68
PA10: R19.2 U26.44 | length 375.1
  1-SIG-TOP w6: U26.44@1498.62,1631.1 1533.9,1631.1 v1(1535,1630)
  4-SIG-HOR w6: v1(1535,1630) 1545.52,1630 1546.37,1629.16 1563.63,1629.16 1572.48,1638 1589.45,1638 1602.45,1651 1694,1651 v1(1725,1620)
  5-SIG-VERT w6: v1(1725,1620) 1725,1516.65 v1(1725.82,1515.82)
  6-GND-BOT w6: R19.2@1725,1494.68 1725.82,1495.51 v1(1725.82,1515.82)
PA11: NT2.1 U26.45 | length 49.7
  1-SIG-TOP w6: NT2.1@1452,1604 1468.63,1604 1476.05,1611.42 U26.45@1498.62,1611.42
PA12: NT1.1 U26.46 | length 46.7
  1-SIG-TOP w6: NT1.1@1452,1592 1473,1592 1473.27,1591.73 U26.46@1498.62,1591.73
PA13: D5.4 U26.49 X1.2 | length 963.2
  1-SIG-TOP w6: v1(1575,1415) 1577.36,1417.36 U26.49@1577.36,1473.62
  4-SIG-HOR w6: v1(1575,1110) 1575.84,1110.84 1603.63,1110.84 1609.48,1105 1775,1105 v1(1775,1110)
  5-SIG-VERT w6: v1(1575,1110) 1591.84,1126.84 1591.84,1321.91 1575,1338.75 v1(1575,1415)
  6-GND-BOT w6: D5.4@1774.41,1061.22 1774.41,1109.41 v1(1775,1110) 1780,1110 1789,1119 1952.97,1119 1966.97,1105 2000,1105 2015,1090 2045,1090 2050,1085 X1.2@2050,1050
PA14: D5.5 U26.50 X1.4 | length 959.2
  1-SIG-TOP w6: v1(1595,1510) 1597.05,1507.95 U26.50@1597.05,1473.62
  4-SIG-HOR w6: v1(1595,1090) 1760,1090 1765,1085 1795,1085 v1(1800,1090)
  5-SIG-VERT w6: v1(1595,1090) 1603.84,1098.84 1603.84,1331.68 1589.16,1346.37 1589.16,1399.68 1595.84,1406.37 1595.84,1509.16 v1(1595,1510)
  6-GND-BOT w6: D5.5@1800,1061.22 v1(1800,1090) 1817,1107 1948,1107 1965,1090 1995,1090 2000,1085 X1.4@2000,1050
PA15: Q1.1 R21.2 R22.1 U26.51 | length 1395.3
  1-SIG-TOP w6: v1(1610,1355) 1611.95,1356.95 1611.95,1468.84 U26.51@1616.73,1473.62
  4-SIG-HOR w6: v1(1330,730) 1340.52,730 1341.37,730.84 1358.63,730.84 1367.48,722 1598.73,722 v1(1610,733.27)
  5-SIG-VERT w6: v1(1330,505) 1337,512 1337,627.52 1345.84,636.37 1345.84,654.72 1330,670.56 v1(1330,730) ; v1(1610,733.27) 1615.84,739.11 1615.84,1349.16 v1(1610,1355)
  6-GND-BOT w6: R22.1@1330,464.68 v1(1330,505) R21.2@1330,530.32 ; v1(1330,730) 1330.31,729.68 Q1.1@1330.31,675.2
PB0: U26.24 U27.2 | length 942.9
  1-SIG-TOP w6: U26.24@1734.84,1926.38 1735,1926.22 v1(1735,1890.91)
  4-SIG-HOR w6: v1(1300,1770) 1310,1760 1452.66,1760 1458.46,1765.8 1474.2,1765.8 1485.8,1754.2 1541.87,1754.2 1553.46,1765.8 1566.54,1765.8 1567.34,1765 1615,1765 1616.2,1765 1621,1769.8 1621,1793 1625.8,1797.8 1632.2,1797.8 1637,1793 1637,1765 1637,1750.05 1641.8,1745.25 1648.2,1745.25 1653,1750.05 1653,1765 1653,1793 1657.8,1797.8 1664.2,1797.8 1669,1793 1669,1765 1669,1750.05 1673.8,1745.25 1680.2,1745.25 1685,1750.05 1685,1765 1685,1793 1689.8,1797.8 1696.2,1797.8 1701,1793 1701,1765 1701,1750.05 1705.8,1745.25 1712.2,1745.25 1717,1750.05 1717,1760.2 1721.8,1765 1725,1765 v1(1745,1765)
  5-SIG-VERT w6: v1(1735,1890.91) 1745,1880.91 1745,1802.34 1745.8,1801.54 1745.8,1788.46 1745,1787.66 v1(1745,1765)
  6-GND-BOT w6: v1(1300,1770) U27.2@1300,1809.25
PB1: U26.25 U27.5 | length 942.5
  1-SIG-TOP w6: v1(1715,1965) 1715,1926.54 U26.25@1715.16,1926.38
  4-SIG-HOR w6: v1(1200,2135) 1211.97,2135 1243.97,2167 1321.03,2167 1339.03,2149 1704,2149 v1(1715,2160)
  5-SIG-VERT w6: v1(1715,1965) 1715,2080 1715,2084.2 cw(c1719.8,2084.2) 1719.8,2089 1731.68,2089 ccw(c1731.68,2093.8) 1736.48,2093.8 1736.48,2100.2 ccw(c1731.68,2100.2) 1731.68,2105 1715,2105 1692.37,2105 cw(c1692.37,2109.8) 1687.57,2109.8 1687.57,2116.2 cw(c1692.37,2116.2) 1692.37,2121 1715,2121 1731.68,2121 ccw(c1731.68,2125.8) 1736.48,2125.8 1736.48,2132.2 ccw(c1731.68,2132.2) 1731.68,2137 1719.8,2137 cw(c1719.8,2141.8) 1715,2141.8 1715,2145 v1(1715,2160)
  6-GND-BOT w6: U27.5@1200,2090.75 v1(1200,2135)
PB2: Q2.1 R31.1 U26.26 | length 1295.7
  1-SIG-TOP w6: v1(1695,1985) 1695,1926.85 U26.26@1695.47,1926.38 ; v1@2300.43,2460.43 v1@2300.87,2460 ; v1(2305,2460) 2305,2493.97 Q2.1@2310.43,2499.4 2354.09,2499.4 R31.1@2360,2505.32
  4-SIG-HOR w6: v1(1695,1985) 1745,1985 1765,2005 2265,2005 v1(2305,1965)
  5-SIG-VERT w6: v1(2305,1965) 2293.16,1976.84 2293.16,2453.16 2300,2460 v1(2305,2460)
PB3: U20.6 U26.56 | length 2414
  1-SIG-TOP w6: v1(1700,1515) 1715.16,1499.84 U26.56@1715.16,1473.62
  4-SIG-HOR w6: v1(1700,690.84) 1710,700.84 1755.78,700.84 1774.47,682.16 2333.6,682.16 2341.29,689.84 3139.84,689.84 3151.43,701.43 v1(3153.57,701.43)
  5-SIG-VERT w6: v1(1700,690.84) 1700,718.37 1706.83,725.2 1706.83,740.8 1700,747.63 1700,1405 1684.16,1420.84 1684.16,1439.16 1700,1455 v1(1700,1515)
  6-GND-BOT w6: v1(3153.57,701.43) 3156.16,698.84 3202.14,698.84 U20.6@3202.36,698.62
PB4: C97.2 Q12.3 R19.1 U23.11 U26.57 | length 2112.8
  1-SIG-TOP w6: U26.57@1734.84,1473.62 1734.84,1435.16 v1(1735,1435)
  4-SIG-HOR w6: v1(605,702.5) 608.3,699.2 710.8,699.2 v1(715,695) ; v1(710,1430.81) 710,1430 850,1430 854.16,1434.16 854.68,1434.16 866.37,1445.84 883.63,1445.84 892.48,1437 1038.52,1437 1041.37,1434.16 1065.22,1434.16 1075.22,1444.16 1454.65,1444.16 1457.32,1446.83 1512.68,1446.83 1515.35,1444.16 1547.88,1444.16 1559.56,1455.84 1646.47,1455.84 1654.31,1448 1722,1448 v1(1735,1435)
  5-SIG-VERT w6: v1(710,1430.81) 705,1425.81 705,1406.63 708.83,1402.8 708.83,1387.2 707,1385.37 707,1100.34 715.8,1091.54 715.8,1078.46 707,1069.66 707,883.63 705,881.63 v1(705,855) 689.83,839.83 689.83,736.8 715,711.63 v1(715,695)
  6-GND-BOT w6: U23.11@584.06,681.5 596.5,681.5 605,690 v1(605,702.5) ; Q12.3@679.69,800.2 679.69,829.68 685,835 C97.2@685,855.32 685.31,855 v1(705,855) ; R19.1@1725,1455.32 1725,1445 v1(1735,1435)
PB5: U20.5 U26.58 | length 2334.6
  1-SIG-TOP w6: v1(1754.18,1510.82) 1754.53,1510.47 U26.58@1754.53,1473.62
  4-SIG-HOR w6: v1(1750,680) 1759.84,670.16 2338.57,670.16 2346.26,677.84 3167.16,677.84 v1(3170,675)
  5-SIG-VERT w6: v1(1750,680) 1750,1427.66 1750.8,1428.46 1750.8,1441.54 1750,1442.34 1750,1506.65 v1(1754.18,1510.82)
  6-GND-BOT w6: v1(3170,675) 3177.87,682.87 U20.5@3202.36,682.87
PB6: C95.2 Q12.6 R18.1 U23.12 U26.59 | length 2077.5
  1-SIG-TOP w6: U26.59@1774.21,1473.62 1774.21,1435.79 v1(1775,1435)
  4-SIG-HOR w6: v1(650,1415) 653,1418 696.19,1418 702.2,1411.99 717.8,1411.99 723.81,1418 852.52,1418 866.37,1404.16 883.63,1404.16 892.48,1413 1028.58,1413 1031.43,1410.16 1075.16,1410.16 1085.16,1420.16 1464.59,1420.16 1467.26,1422.83 1502.74,1422.83 1505.41,1420.16 1557.82,1420.16 1568.46,1430.8 1581.54,1430.8 1591.5,1420.84 1625.37,1420.84 1630.04,1416.17 1645.63,1416.17 1650.3,1420.84 1679.16,1420.84 1685.84,1414.16 1754.16,1414.16 v1(1775,1435)
  5-SIG-VERT w6: v1(635,715) 641.83,721.83 641.83,909.58 639.17,912.23 639.17,950.8 660,971.63 660,1056.63 641.17,1075.45 641.17,1406.17 v1(650,1415)
  6-GND-BOT w6: U23.12@584.06,665.75 598.41,665.75 617,684.33 624.65,684.33 C95.2@635,694.68 v1(635,715) 640.31,720.32 Q12.6@640.31,749.8 ; v1(1775,1435) 1780,1440 R18.1@1780,1455.32
PB7: OLED.14 R9.2 TFT.20 U26.60 | length 2263
  1-SIG-TOP w6: U26.60@1793.9,1473.62 1793.9,1518.9 v1(1799.18,1524.18) ; R9.2@2785,605.32 v1(2785,585) 2785.43,584.57 TFT.20@2785.43,511.81
  4-SIG-HOR w6: v1(1799.18,1524.18) 1808.83,1533.83 1832.8,1533.83 1835.83,1530.8 1866.91,1530.8 1880.71,1517 1913.27,1517 1919.22,1511.05 1930.78,1511.05 1938.95,1519.22 1938.95,1520.84 2163.63,1520.84 2174.48,1510 2290,1510 v1(2295,1505) ; v1(2300,1335) 2303,1338 2868.61,1338 v1(2870,1336.61)
  5-SIG-VERT w6: v1(2295,1505) 2295,1479.48 2305.84,1468.63 2305.84,1340.84 v1(2300,1335) ; v1(2785,585) 2840.8,640.8 2840.8,741.54 2843,743.75 2843,1309.61 v1(2870,1336.61)
  6-GND-BOT w6: OLED.14@2809.84,1336.61 v1(2870,1336.61)
PB8: BTN2.2 OLED.15 TFT.16 U26.61 | length 3638.2
  1-SIG-TOP w6: U26.61@1813.58,1473.62 1813.58,1436.42 v1(1815,1435) ; v1(2860,565) 2865,560 2865,512.64 TFT.16@2864.17,511.81
  4-SIG-HOR w6: v1(1570,500) 1837.66,500 1843.46,494.2 1856.54,494.2 1862.34,500 2000.52,500 2006.37,505.84 2023.63,505.84 2024.48,505 2100,505 2130,535 2143.03,535 2150.87,542.84 2188.6,542.84 2197.45,534 2399.52,534 2411.37,545.84 2428.63,545.84 2432.32,542.16 2538.37,542.16 2546.37,534.16 2563.63,534.16 2584.48,555 2840,555 2850,565 v1(2860,565) ; v1(1815,1435) 1843.95,1463.95 1895.78,1463.95 1901.73,1458 2283,1458 v1(2285,1460) ; v1(2285,1360) 2290.26,1354.74 2291.37,1355.84 2308.63,1355.84 2314.48,1350 2853.91,1350 2868.91,1365 v1(2875,1365)
  5-SIG-VERT w6: v1(2285,1360) 2284,1361 2284,1459 v1(2285,1460) ; v1(2860,565) 2872.16,577.16 2872.16,952.16 2895.84,975.84 2895.84,1344.16 v1(2875,1365)
  6-GND-BOT w6: BTN2.2@1469.8,472.83 BTN2.2@1570.2,472.83 1570.2,499.8 v1(1570,500) ; OLED.15@2809.84,1364.17 2874.17,1364.17 v1(2875,1365)
PB9: R86.2 U13.2 U26.62 | length 1558.9
  1-SIG-TOP w6: v1(1825,1515) 1833.27,1506.73 U26.62@1833.27,1473.62
  4-SIG-HOR w6: v1(1825,1515) 1827.66,1515 1848.46,1494.2 1861.54,1494.2 1872.34,1505 1908.3,1505 1914.25,1499.05 1935.75,1499.05 1945.55,1508.84 2146.16,1508.84 v1(2155,1500)
  5-SIG-VERT w6: v1(2155,1500) 2146.05,1491.05 2146.05,648.39 2144.2,646.54 2144.2,633.46 2151.05,626.61 2151.05,491.05 2139.2,479.2 2139.2,450.8 v1(2160,430)
  6-GND-BOT w6: U13.2@2129.53,434.84 2129.69,435 2145,435 2149.94,430.06 2159.94,430.06 v1(2160,430) 2170,430 2175,425 R86.2@2195.31,425
PB10: U1.4 U26.30 | length 3222
  1-SIG-TOP w6: v1(210,355) 220.16,365.16 U1.4@273.23,365.16 ; U26.30@1616.73,1926.38 1616.73,1961.73 v1(1620,1965)
  4-SIG-HOR w6: v1(210,600) 233.37,600 245.53,587.84 430.53,587.84 437.2,581.17 452.8,581.17 476.63,605 657.66,605 663.46,599.2 676.54,599.2 682.34,605 785,605 v1(800,590) ; v1(790,1960) 842.66,1960 843.46,1959.2 856.54,1959.2 857.34,1960 1537.66,1960 1543.46,1965.8 1560.05,1965.8 1563.89,1961.95 1616.95,1961.95 v1(1620,1965)
  5-SIG-VERT w6: v1(210,355) 210,379.43 202.17,387.26 202.17,592.17 v1(210,600) ; v1(790,1960) 790,1899.08 793,1896.08 793,1737.48 779.16,1723.63 779.16,1611.41 805,1585.57 805,1538.37 795,1528.37 795,1221.63 808.83,1207.8 808.83,1192.2 802,1185.37 802,1081.6 810.83,1072.77 810.83,1047.23 802,1038.4 802,592 v1(800,590)
PB12: U26.34
PB15: R8.2 R109.1 R111.1 U26.37 | length 2874.3
  1-SIG-TOP w6: U26.37@1498.62,1768.9 1499.72,1770 v1(1535,1770) ; R109.1@2725,644.68 2749.68,644.68 2749.68,664.68 2770,685 R8.2@2785.32,685
  4-SIG-HOR w6: v1(1535,1475) 1542.16,1467.84 1651.44,1467.84 1659.28,1460 1823.03,1460 1838.98,1475.95 1900.75,1475.95 1906.7,1470 2265.52,1470 2276.37,1480.84 2293.63,1480.84 2322.48,1452 2855.35,1452 2867.2,1463.84 2891.16,1463.84 v1(2910,1445) ; v1(2750,645) 2755,640 v1(2905,640)
  5-SIG-VERT w6: v1(1535,1475) 1535,1610 1530.8,1614.2 1528.46,1614.2 1519.2,1623.46 1519.2,1721.54 1535,1737.34 v1(1535,1770) ; v1(2905,640) 2896.16,648.84 2896.16,942.22 2919.84,965.9 2919.84,1354.1 2910,1363.94 v1(2910,1445)
  6-GND-BOT w6: v1(2910,1445) 2910,1448.65 2934.68,1473.33 R111.1@2934.68,1475